# EAGLE board p2ggr-001 (EAGLE 9.6.2)
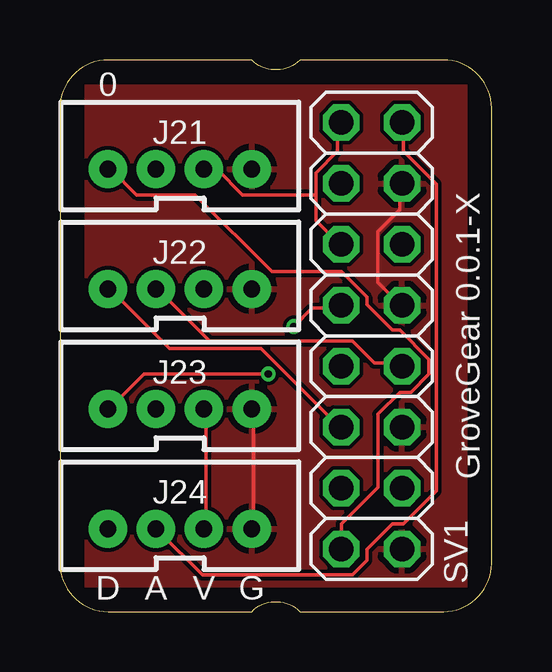
[diagram p0: board, top side]
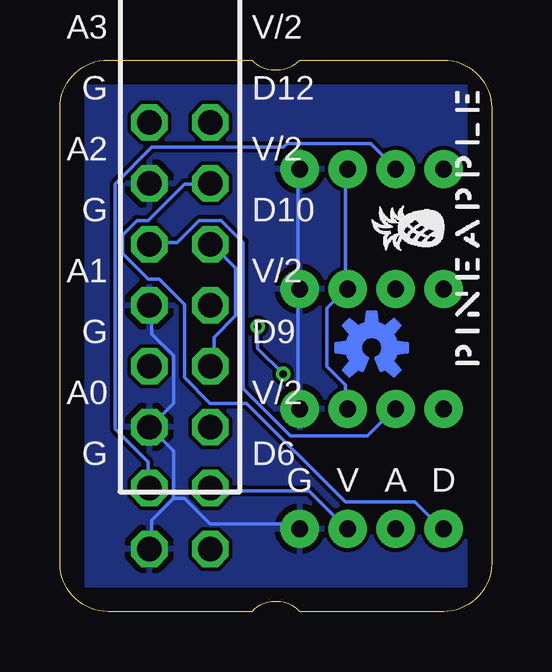
[diagram p1: board, bottom side, seen from below]

Size 18 x 23 mm. Coordinates in mm from the lower left corner, seen from the top.
Outline: 0,21 0,2 arc90 2,0 8,0 arc-90 10,0 16,0 arc90 18,2 18,21 arc90 16,23 10,23 arc-90 8,23 2,23 arc90 0,21
Copper layers (1*16): Top 0.035mm / dielectric 1.5mm / Bottom 0.035mm
Design rules "SeeedStudio_2layer_DRU_no_angle_20140221": minimum track width 6mil, minimum drill 12mil, track to track 6mil, track to pad 6mil, pad to pad 6mil, via to via 6mil, smd to smd 0mil, copper to edge 10mil, drill to drill 10mil, minimum pad ring 10mil, minimum via ring 6mil, stop-mask expansion 2mil, vias tented up to drill 100mil, thermal gap 10mil
Net classes: 0 default: width 0.152 mm, drill 0.152 mm, clearance 0.152 mm; 1 ground: width 0.305 mm, drill 0.152 mm, clearance 0.152 mm; 2 power1: width 0.508 mm, drill 0.152 mm, clearance 0.152 mm; 3 power2: width 0.61 mm, drill 0.152 mm, clearance 0.152 mm; 4 analog: width 0.305 mm, drill 0.152 mm, clearance 0.152 mm; 5 external: width 0.152 mm, drill 0.152 mm, clearance 0.152 mm
tRestrict: area 0,0 to 1,23; area 0,22 to 18,23; area 17,0 to 18,23; area 0,0 to 18,1
bRestrict: area 0,0 to 18,1; area 17,0 to 18,23; area 0,22 to 18,23; area 0,0 to 1,23

## Footprints (pad centres in the part's own frame; a part is rotated, then mirrored left to right if it is on the bottom)
JST-4-PTH-VERT = drill 0.7 pad 1.6: 1 -3,-0.55; 2 -1,-0.55; 3 1,-0.55; 4 3,-0.55
2X08 = drill 1.016 octagon: 1 -8.89,-1.27; 2 -8.89,1.27; 3 -6.35,-1.27; 4 -6.35,1.27; 5 -3.81,-1.27; 6 -3.81,1.27; 7 -1.27,-1.27; 8 -1.27,1.27; 9 1.27,-1.27; 10 1.27,1.27; 11 3.81,-1.27; 12 3.81,1.27; 13 6.35,-1.27; 14 6.35,1.27; 15 8.89,-1.27; 16 8.89,1.27

## Placement (x,y rotation side)
J21  [JST-4-PTH-VERT]  5,19 0 top
J22  [JST-4-PTH-VERT]  5,14 0 top
J23  [JST-4-PTH-VERT]  5,9 0 top
J24  [JST-4-PTH-VERT]  5,4 0 top
LOGO1  OSHW-LOGOS-COPPER  [OSHW-LOGO-S_COPPER]  5,11 0 bottom
SV1  [2X08]  13,11.5 90 top
U$1  PINEAPPLE450_SILK  [PINEAPPLE450_SILK]  0.5,16 90 bottom

## Library data of the parts
J21-J24 = SparkFun-Connectors; PROD_ID: CONN-13251
LOGO1 = SparkFun-Aesthetics
SV1 = pinhead
U$1 = pineapple

## Nets
ANLG0: J21.2 SV1.3
ANLG1: J22.2 SV1.7
ANLG2: J23.2 SV1.11
ANLG3: J24.2 SV1.15
DTCT0: J21.1 SV1.2
DTCT1: J22.1 SV1.6
DTCT2: J23.1 SV1.10
DTCT3: J24.1 SV1.14
GND: J21.4 J22.4 J23.4 J24.4 SV1.1 SV1.5 SV1.9 SV1.13
VCC: J21.3 J22.3 J23.3 J24.3 SV1.4 SV1.8 SV1.12 SV1.16

## Tracks (layer width: path | path; a pad name or v marks a point on that pad's centre or on a via)
ANLG0
  Bottom 0.152: SV1.3 14.33,5.18 14.33,6.25 15.7,7.62 15.7,17.83 14.17,19.36 8.69,19.36 8.53,19.51 5.03,19.51 4.12,18.59 J21.2
ANLG1
  Top 0.152: SV1.7 14.17,10.36 13.11,10.36 12.19,11.28 6.25,11.28 4.12,13.41 J22.2
ANLG2
  Bottom 0.152: SV1.11 14.17,15.39 13.11,15.39 12.19,16.31 11.28,16.31 10.36,15.39 10.36,9.3 8.38,7.32 5.18,7.32 4.12,8.38 J23.2
ANLG3
  Top 0.152: SV1.15 14.33,20.27 14.33,19.2 15.7,17.83 15.7,5.03 14.33,3.66 13.87,3.66 12.8,2.59 12.8,2.13 12.19,1.52 5.94,1.52 4.12,3.35 J24.2
DTCT0
  Top 0.152: SV1.2 11.73,2.74 11.73,3.66 13.26,5.18 13.26,8.23 14.17,9.14 14.63,9.14 15.39,9.91 15.39,10.52 14.17,11.73 13.87,11.73 12.8,12.8 12.8,13.11 11.73,14.17 8.84,14.17 5.64,17.37 3.2,17.37 2.13,18.44 J21.1
DTCT1
  Top 0.152: SV1.6 11.58,7.77 8.38,10.97 4.57,10.97 2.13,13.41 J22.1
DTCT2  (via drill 0.3)
  Top 0.152: v9.75,11.89 10.52,12.65 11.58,12.65 SV1.10 | v8.69,9.91 3.5,9.91 2.13,8.53 J23.1
  Bottom 0.152: v9.75,11.89 9.75,10.97 v8.69,9.91
DTCT3
  Bottom 0.152: SV1.14 11.73,17.83 12.8,17.83 14.33,16.31 14.78,16.31 15.39,15.7 15.39,14.94 14.33,13.87 13.87,13.87 12.8,12.8 12.8,9.75 11.73,8.69 10.21,8.69 6.1,4.57 3.2,4.57 2.13,3.5 J24.1
GND
  Top 0.152: SV1.13 14.17,17.83 14.17,16.76 13.26,15.85 13.26,13.72 14.17,12.8 SV1.9 | J24.4 8.08,3.5 8.08,8.38 J23.4
  Bottom 0.152: 13.26,4.72 14.17,3.81 14.17,2.74 SV1.1 | 13.26,4.72 13.26,6.71 14.17,7.62 SV1.5 14.17,7.77 13.26,8.69 13.26,10.67 14.17,11.58 14.17,12.65 SV1.9 | J21.4 8.08,18.44 8.08,13.56 J22.4 8.08,13.41 8.08,8.53 J23.4 | 13.26,4.72 12.8,4.72 11.73,3.66 8.23,3.66 8.08,3.5 J24.4
  pour Bottom: -1,-1 19,-1 19,24 -1,24
  pour Top: -2,-2 20,-2 20,25 -2,25
VCC
  Top 0.152: J23.3 6.1,8.38 6.1,3.5 J24.3 | 10.67,17.37 10.67,16.31 11.58,15.39 SV1.12 | 10.67,17.37 10.67,18.29 11.58,19.2 11.58,20.27 SV1.16 | 10.67,17.37 7.62,17.37 6.55,18.44 6.1,18.44 J21.3
  Bottom 0.152: SV1.4 11.58,5.03 7.62,5.03 6.1,3.5 J24.3 | J21.3 6.1,18.44 6.1,13.56 J22.3 6.1,13.41 6.86,12.65 6.86,10.21 6.1,9.45 6.1,8.53 J23.3 | SV1.8 11.58,10.36 11.58,11.43 10.67,12.34 10.67,14.33 11.58,15.24 SV1.12

## Text on the board
tNames: 0 | GroveGear 0.0.1-X | D | A | V | G
bNames: V/2 | A3 | D12 | G | V/2 | A2 | D10 | G | V/2 | A1 | D9 | G | V/2 | A0 | D6 | G | D | A | V | G